# Altium PCB Drone_PCB_STM32_MCU_for_altium.pcbdoc
Units mm, origin at the board's own origin, x right, y up, seen from the top; angles counter-clockwise.
Board outline 112.57 x 115.06 mm, 2 copper layers (Top Layer, Bottom Layer); 72 components, 102 nets, 269 pads, 48 vias.
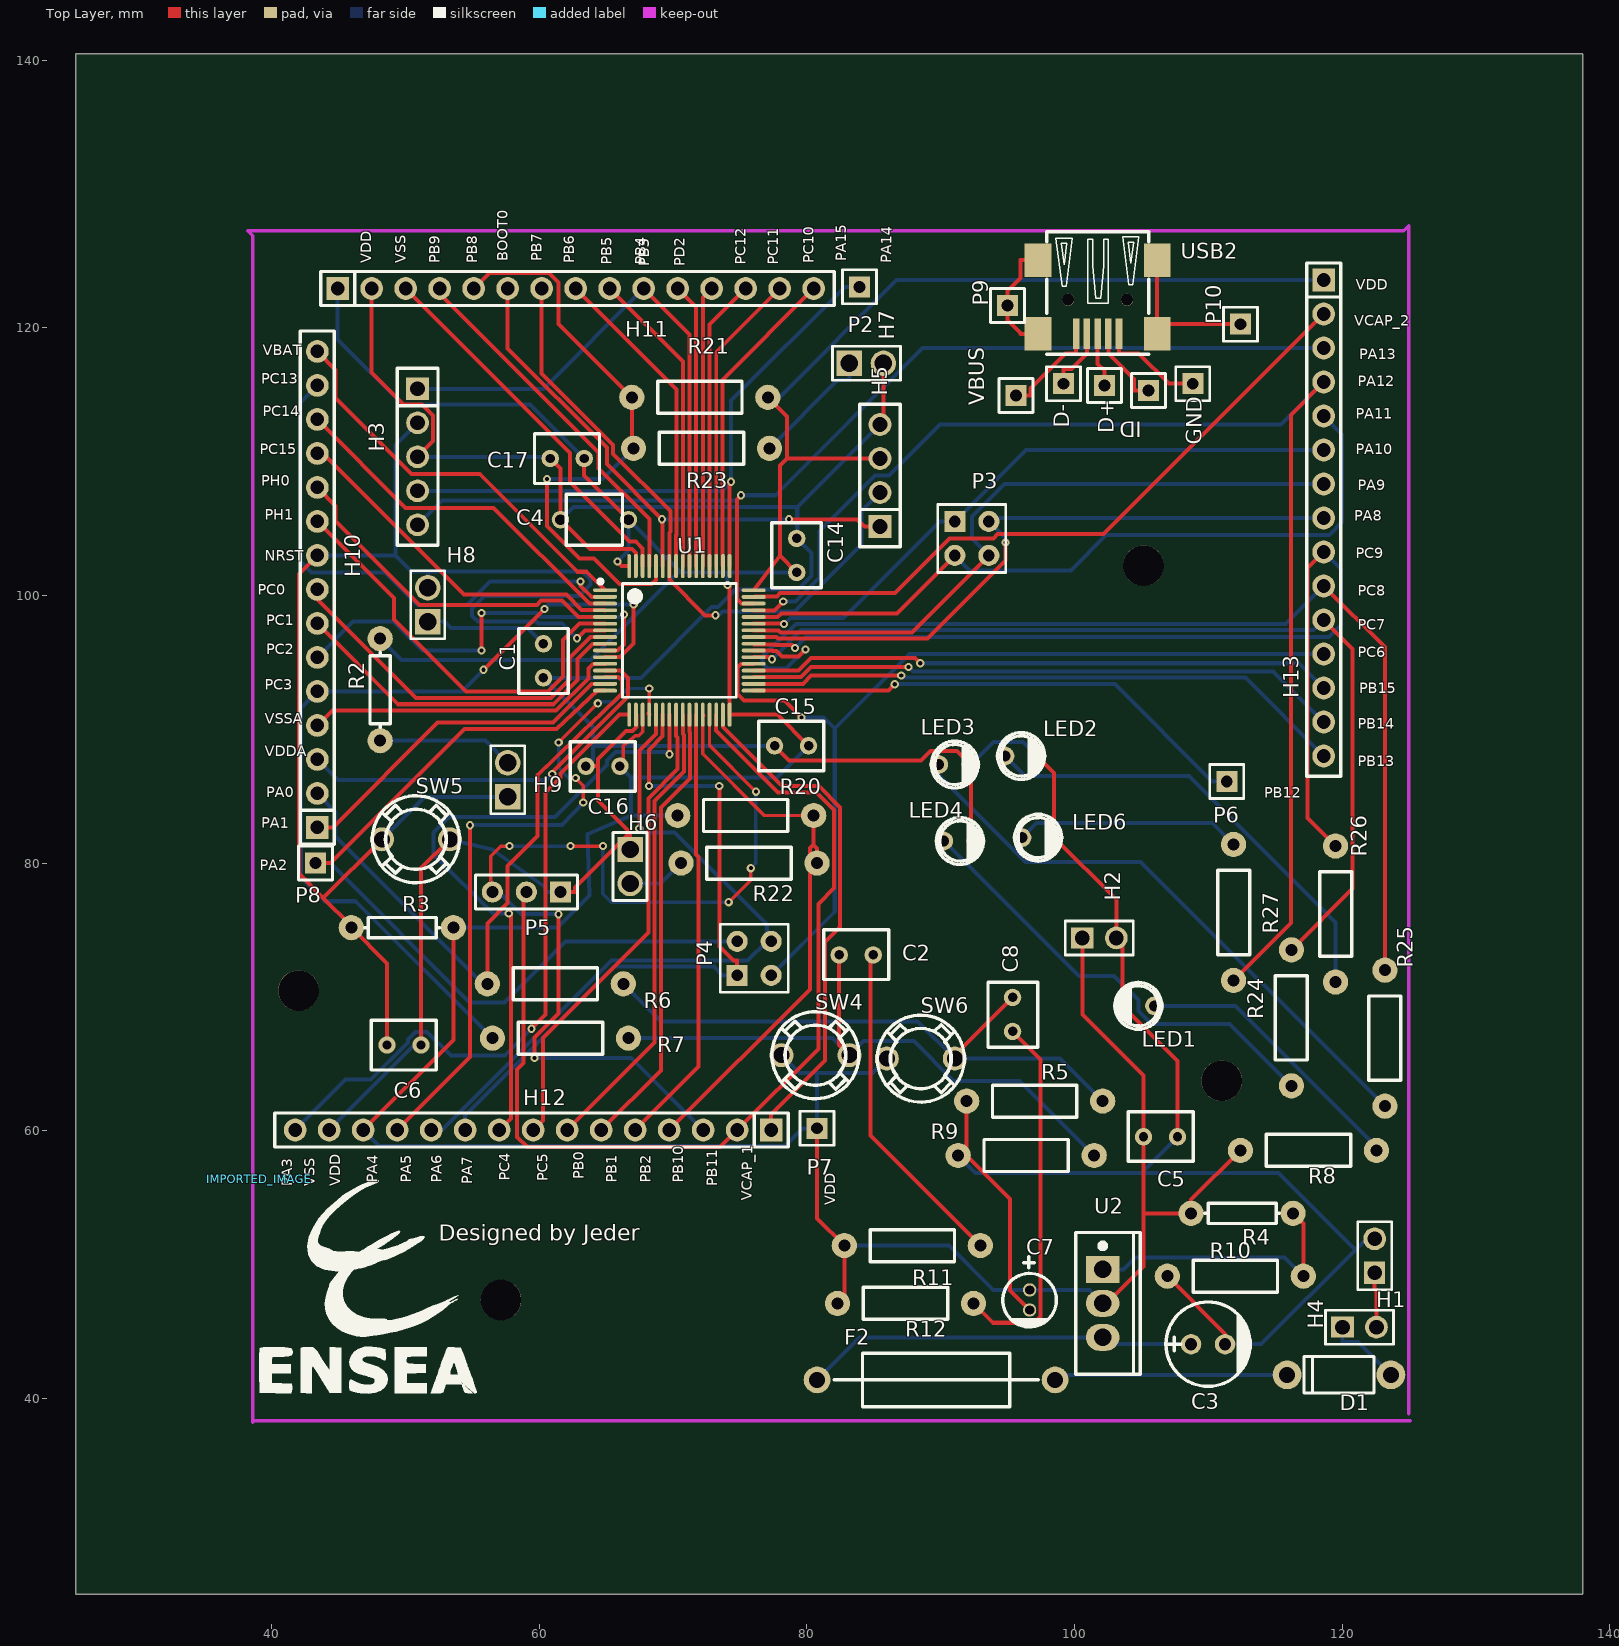
[diagram p0: Top Layer view]
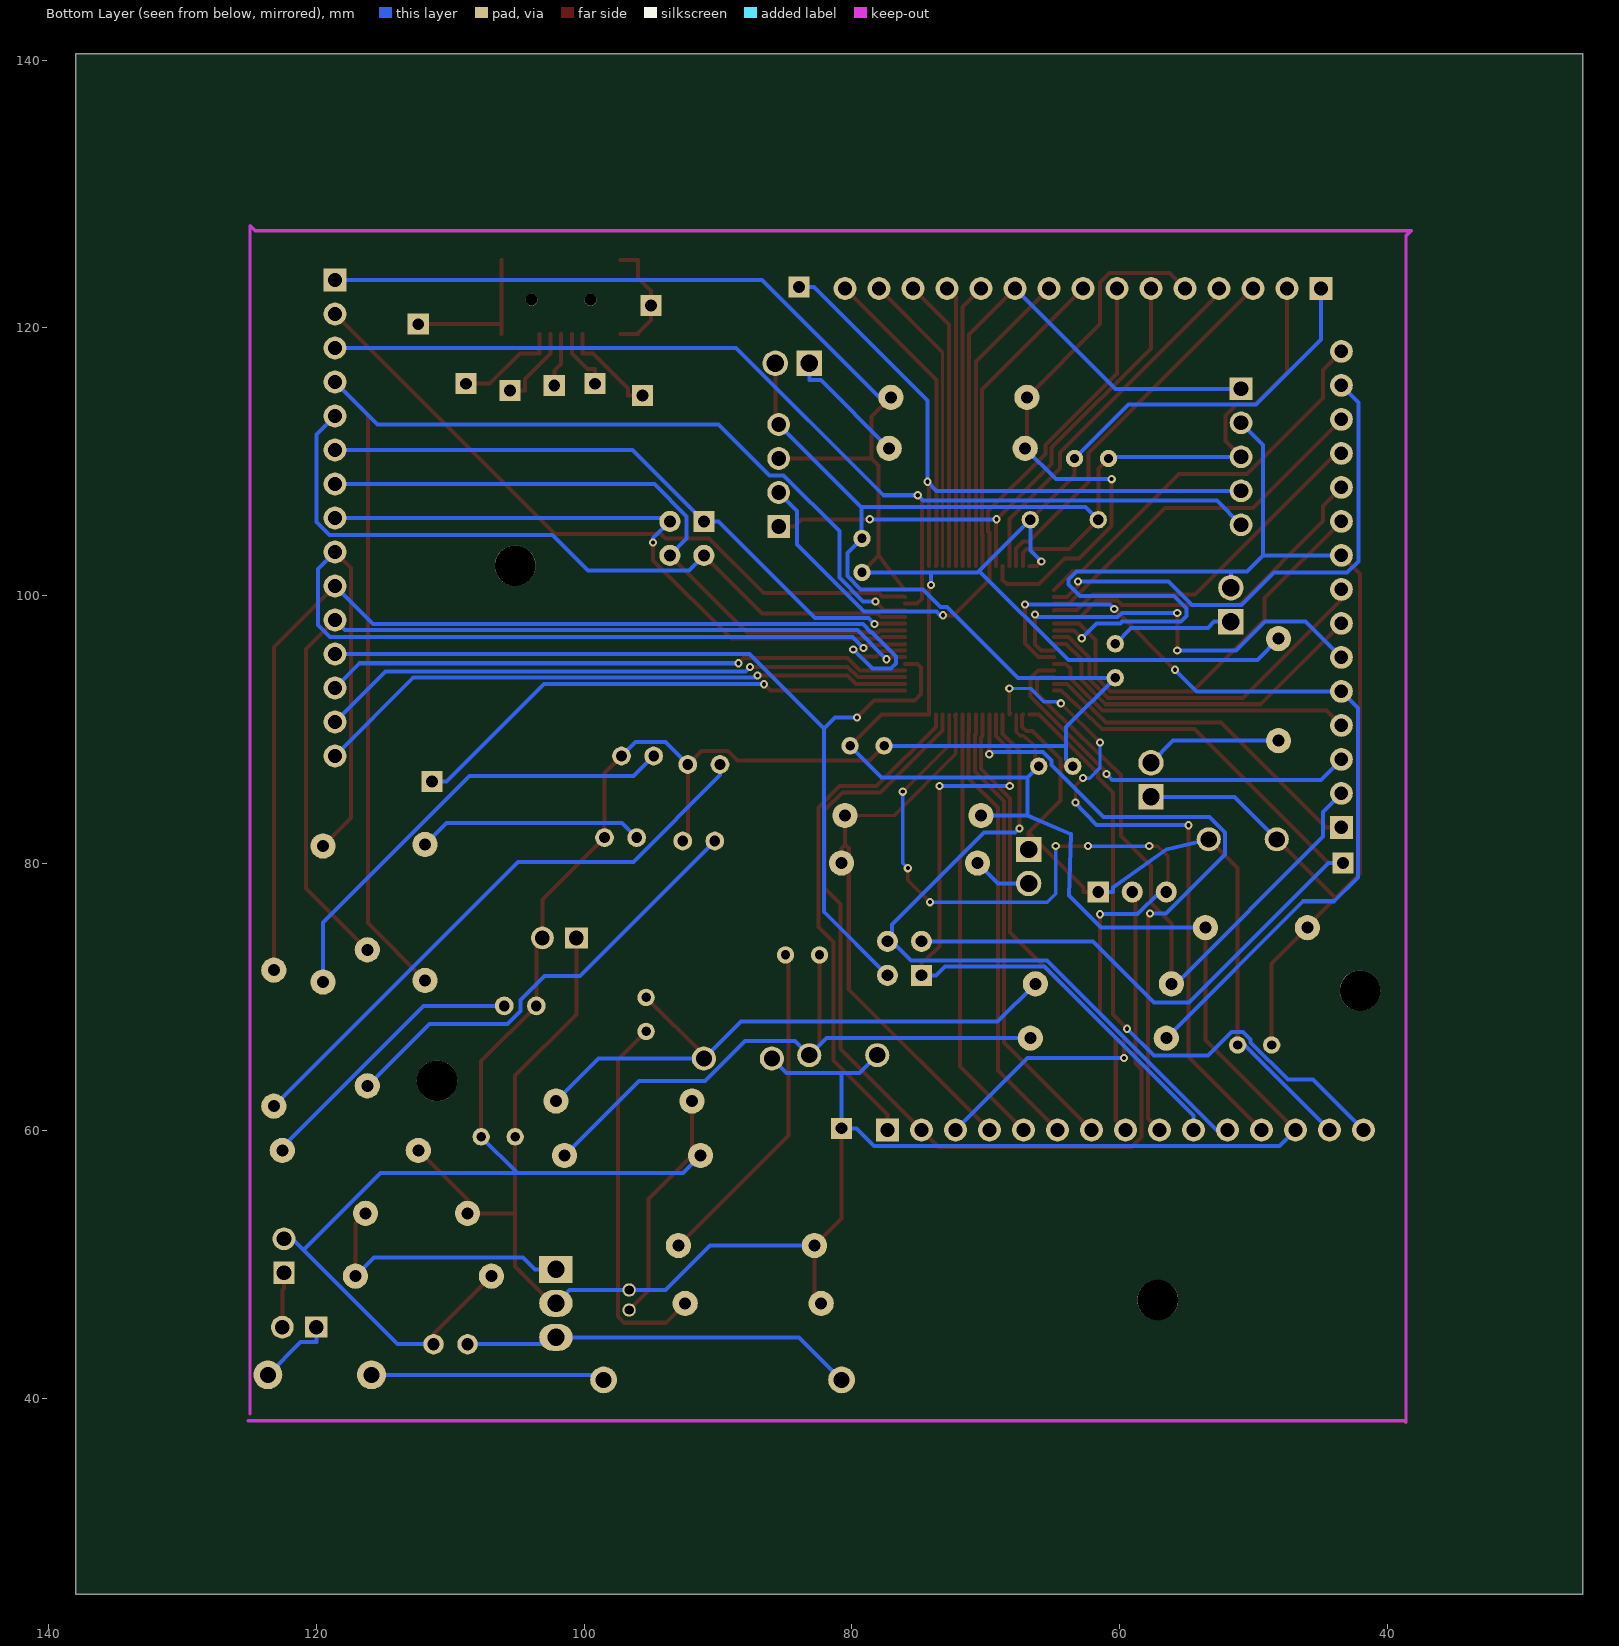
[diagram p1: Bottom Layer view, seen from below]

## Layer stack, top to bottom
Top Layer: signal copper (thickness not stored)
Dielectric: dielectric 0.32, FR-4, Dk 4.8
Bottom Layer: signal copper (thickness not stored)

## Board outline
137.973,25.4 25.4,25.4 25.4,140.462 137.973,140.462

## Components (designator, comment, footprint, x,y, rotation, side; value= is the part's Value field where it differs from the comment)
C1 "100nF" CAP-CT4G-0805-2.54MM 60.325,95.123 r90 top
C2 "100nF" CAP-CT4G-0805-2.54MM 83.693,73.152 r180 top
C3 "100uF" CAP-D6.3XF2.5 109.982,44.069 r0 top
C4 "470nF" CAP-4.2*3.8-5.08 64.135,105.664 r0 top
C5 "100nF" CAP-CT4G-0805-2.54MM 106.426,59.563 r180 top
C6 "100nF" CAP-CT4G-0805-2.54MM 49.911,66.421 r0 top
C7 "10uF" CAP-D4.0XF1.5 96.647,47.371 r0 top
C8 "100nF" CAP-CT4G-0805-2.54MM 95.377,68.707 r90 top
C14 "100nF" CAP-CT4G-0805-2.54MM 79.248,102.997 r270 top
C15 "100nF" CAP-CT4G-0805-2.54MM 78.867,88.773 r0 top
C16 "100nF" CAP-CT4G-0805-2.54MM 64.77,87.249 r0 top
C17 "100nF" CAP-CT4G-0805-2.54MM 62.103,110.236 r0 top
D1 "1N4001GP-E3/73" DO-41 119.761,41.783 r180 top
D+ "Header-Male-2.54_1x1" HDR-1X1/2.54 102.235,115.697 r90 top
D- "Header-Male-2.54_1x1" HDR-1X1/2.54 99.187,115.824 r90 top
F2 "3F0.5A 250V" 3.6*10 89.662,41.402 r180 top
GND "Header-Male-2.54_1x1" HDR-1X1/2.54 108.839,115.824 r90 top
H1 "Header-Male-2.54_1x2" HDR-2X1/2.54#1 122.428,49.403 r180 top
H2 "Header-Male-2.54_1x2" HDR-2X1/2.54#1 100.584,74.422 r90 top
H3 "Header-Male-2.54_1x5" DIP-1X5P-2.54MM-M 50.927,110.363 r270 top
H4 "Header-Male-2.54_1x2" HDR-2X1/2.54#1 120.015,45.339 r90 top
H5 "MPU" DIP-1X4P-2.54MM-M 85.471,108.966 r90 top
H6 "Header-Male-2.54_1x2" HDR-2X1/2.54#2 66.802,79.756 r0 top
H7 "Header-Male-2.54_1x2" HDR-2X1/2.54#2 84.455,117.348 r90 top
H8 "Header-Male-2.54_1x2" HDR-2X1/2.54#2 51.689,99.314 r180 top
H9 "Header-Male-2.54_1x2" HDR-2X1/2.54#2 57.658,86.233 r180 top
H10 "Header-Male-2.54_1x15" DIP-1X15P-2.54MM-M 43.434,100.457 r90 top
H11 "Header-Male-2.54_1x15" DIP-1X15P-2.54MM-M 62.738,122.936 r0 top
H12 "Header-Male-2.54_1x15" DIP-1X15P-2.54MM-M 59.563,60.071 r180 top
H13 "Header-Male-2.54_1x15" DIP-1X15P-2.54MM-M 118.618,105.791 r270 top
ID "Header-Male-2.54_1x1" HDR-1X1/2.54 105.537,115.316 r90 top
IMPORTED_IMAGE "IMPORTED_IMAGE" IMPORTED_IMAGE 39.112,56.392 r0 top
LED1 "204-10SUBC/S400-A4" LED-3MM 104.775,69.342 r180 top
LED2 "204-10SUBC/S400-A4" LED-3MM 96.012,88.011 r0 top
LED3 "204-10SUBC/S400-A4" LED-3MM 91.059,87.376 r0 top
LED4 "204-10SUBC/S400-A4" LED-3MM 91.44,81.661 r0 top
LED6 "204-10SUBC/S400-A4" LED-3MM 97.282,81.915 r0 top
P2 "Header-Male-2.54_1x1" HDR-1X1/2.54 83.947,123.063 r0 top
P3 "Header-Male-2.54_2x2" HDR-2X2/2.54 92.329,104.267 r0 top
P4 "Header-Male-2.54_2x2" HDR-2X2/2.54 76.073,72.898 r90 top
P5 "DEBUG" HDR-3X1/2.54 59.055,77.851 r180 top
P6 "Header-Male-2.54_1x1" HDR-1X1/2.54 111.379,86.106 r0 top
P7 "Header-Male-2.54_1x1" HDR-1X1/2.54 80.772,60.198 r0 top
P8 "Header-Male-2.54_1x1" HDR-1X1/2.54 43.307,80.01 r0 top
P9 "Header-Male-2.54_1x1" HDR-1X1/2.54 94.996,121.666 r90 top
P10 "Header-Male-2.54_1x1" HDR-1X1/2.54 112.395,120.269 r90 top
R2 "100K" AXIAL-0.3 48.133,92.964 r90 top
R3 "100K" AXIAL-0.3 49.784,75.184 r0 top
R4 "240" AXIAL-0.3 112.522,53.848 r180 top
R5 "220K" AXIAL-0.4 97.028,62.23 r0 top
R6 "330" AXIAL-0.4 61.214,70.993 r0 top
R7 "330" AXIAL-0.4 61.595,66.929 r0 top
R8 "330" AXIAL-0.4 117.475,58.547 r180 top
R9 "220K" AXIAL-0.4 96.393,58.166 r0 top
R10 "390" AXIAL-0.4 112.014,49.149 r0 top
R11 "100" AXIAL-0.4 87.884,51.435 r180 top
R12 "100" AXIAL-0.4 87.376,47.117 r180 top
R20 "10K" AXIAL-0.4 75.438,83.566 r0 top
R21 "10K" AXIAL-0.4 72.009,114.808 r180 top
R22 "510" AXIAL-0.4 75.692,80.01 r0 top
R23 "510" AXIAL-0.4 72.136,110.998 r180 top
R24 "680" AXIAL-0.4 116.205,68.453 r270 top
R25 "680" AXIAL-0.4 123.19,66.929 r270 top
R26 "680" AXIAL-0.4 119.507,76.2 r270 top
R27 "680" AXIAL-0.4 111.887,76.327 r90 top
SW4 "SKPLAFD010" SW-DIP-6.45X5 80.645,65.659 r0 top
SW5 "SKPLAFD010" SW-DIP-6.45X5 50.8,81.788 r0 top
SW6 "SKPLAFD010" SW-DIP-6.45X5 88.519,65.405 r0 top
U1 "STM32F405RGT6" LQFP-64_10X10X05P 70.485,96.647 r0 top
U2 "LM317T-DG" TO-220(TO-220-3) 102.108,47.117 r0 top
USB2 "USB-MINI-SMD-9.2X9.4-H3.7" USB-MINI-SMD-9.4X9.2-H3.7 101.727,122.301 r180 top
VBUS "Header-Male-2.54_1x1" HDR-1X1/2.54 95.631,114.935 r90 top

## Footprints (in the part's own frame and the unit in brackets; to place one, negate y for a bottom-side part, rotate by r counter-clockwise, add the part's x,y. Pads: shape width x height; smd on the part's side, far side on the other; paste and mask are expansions set on the pad)
3.6*10 [mm]
  round 2 hole 1.2: 1(-8.89,0) 2(8.89,0)
  silkscreen extent -7.62,-2 7.62,2
AXIAL-0.3 [mil]
  round 74 hole 35.4: 1(-150,0) 2(150,0)
  silkscreen extent -110,-30 110,30
AXIAL-0.4 [mil]
  round 74 hole 35.4: 1(-200,0) 2(200,0)
  silkscreen extent -124,-47 124,47
CAP-4.2*3.8-5.08 [mm]
  round 1.3 hole 0.8: 1(-2.54,0) 2(2.54,0)
  silkscreen extent -2.1,-1.9 2.1,1.9
CAP-CT4G-0805-2.54MM [mm]
  round 1.3 hole 0.7: 1(-1.27,0) 2(1.27,0)
  silkscreen extent -2.44,-1.87 2.41,1.84
CAP-D4.0XF1.5 [mm]
  round 1 hole 0.7: 1(0,0.751) 2(0,-0.751)
  silkscreen extent -2,-2.02 2,3.23
CAP-D6.3XF2.5 [mil]
  round 60 hole 36: 1(-50,0) 2(50,0)
  silkscreen extent -124,-124 125,124
DIP-1X4P-2.54MM-M [mm]
  rect 1.7x1.7 hole 1.1: 1(-3.81,0)
  round 1.7 hole 1.1: 2(-1.27,0) 3(1.27,0) 4(3.81,0)
  silkscreen extent -5.33,-1.52 5.33,1.52
DIP-1X5P-2.54MM-M [mm]
  rect 1.7x1.7 hole 1.1: 1(-5.08,0)
  round 1.7 hole 1.1: 2(-2.54,0) 3(0,0) 4(2.54,0) 5(5.08,0)
  silkscreen extent -6.6,-1.52 6.6,1.52
DIP-1X15P-2.54MM-M [mm]
  rect 1.7x1.7 hole 1.02: 1(-17.78,0)
  round 1.7 hole 1.02: 2(-15.24,0) 3(-12.7,0) 4(-10.16,0) 5(-7.62,0) 6(-5.08,0) 7(-2.54,0) 8(0,0) 9(2.54,0) 10(5.08,0) 11(7.62,0) 12(10.16,0) 13(12.7,0) 14(15.24,0) 15(17.78,0)
  silkscreen extent -19.05,-1.27 19.3,1.27
DO-41 [mil]
  round 85 hole 47.24: 1(-152.5,0) 2(152.5,0)
  silkscreen extent -102,-54 102,54
HDR-1X1/2.54 [mil]
  rect 62x62 hole 35: 1(0,0)
  silkscreen extent -50,-50 50,50
HDR-2X1/2.54#1 [mm]
  rect 1.575x1.7 hole 1.1: 1(0,0)
  round 1.7 hole 1.1: 2(0,-2.54)
  silkscreen extent -1.27,-3.81 1.27,1.27
HDR-2X1/2.54#2 [mm]
  rect 1.9x1.9 hole 1.3: 1(0,1.27)
  round 1.9 hole 1.3: 2(0,-1.27)
  silkscreen extent -1.27,-2.54 1.27,2.54
HDR-2X2/2.54 [mil]
  rect 62x62 hole 35: 1(-50,50)
  round 62 hole 35: 2(50,50) 3(-50,-50) 4(50,-50)
  silkscreen extent -100,-100 100,100
HDR-3X1/2.54 [mil]
  rect 62x62 hole 35: 1(-100,0)
  round 62 hole 35: 2(0,0) 3(100,0)
  silkscreen extent -150,-50 150,50
IMPORTED_IMAGE [mm]
  silkscreen extent 0,-16.04 16.25,0
LED-3MM [mm]
  round 1.4 hole 0.8: 1(-1.201,0) 2(1.201,0)
  silkscreen extent -1.75,-1.75 1.75,1.75
LQFP-64_10X10X05P [mm]
  oval 1.8x0.28 smd: 1(-5.55,3.75) 2(-5.55,3.25) 3(-5.55,2.75) 4(-5.55,2.25) 5(-5.55,1.75) 6(-5.55,1.25) 7(-5.55,0.75) 8(-5.55,0.25) 9(-5.55,-0.25) 10(-5.55,-0.75) 11(-5.55,-1.25) 12(-5.55,-1.75) 13(-5.55,-2.25) 14(-5.55,-2.75) 15(-5.55,-3.25) 16(-5.55,-3.75) 33(5.55,-3.75) 34(5.55,-3.25) 35(5.55,-2.75) 36(5.55,-2.25) 37(5.55,-1.75) 38(5.55,-1.25) 39(5.55,-0.75) 40(5.55,-0.25) 41(5.55,0.25) 42(5.55,0.75) 43(5.55,1.25) 44(5.55,1.75) 45(5.55,2.25) 46(5.55,2.75) 47(5.55,3.25) 48(5.55,3.75)
  oval 0.28x1.8 smd: 17(-3.75,-5.55) 18(-3.25,-5.55) 19(-2.75,-5.55) 20(-2.25,-5.55) 21(-1.75,-5.55) 22(-1.25,-5.55) 23(-0.75,-5.55) 24(-0.25,-5.55) 25(0.25,-5.55) 26(0.75,-5.55) 27(1.25,-5.55) 28(1.75,-5.55) 29(2.25,-5.55) 30(2.75,-5.55) 31(3.25,-5.55) 32(3.75,-5.55) 49(3.75,5.55) 50(3.25,5.55) 51(2.75,5.55) 52(2.25,5.55) 53(1.75,5.55) 54(1.25,5.55) 55(0.75,5.55) 56(0.25,5.55) 57(-0.25,5.55) 58(-0.75,5.55) 59(-1.25,5.55) 60(-1.75,5.55) 61(-2.25,5.55) 62(-2.75,5.55) 63(-3.25,5.55) 64(-3.75,5.55)
  silkscreen extent -6.05,-4.25 4.25,4.55
SW-DIP-6.45X5 [mm]
  round 1.8 hole 1.2: 1(-2.54,0) 2(2.54,0)
  silkscreen extent -3.25,-3.25 3.25,3.25
TO-220(TO-220-3) [mm]
  rect 2.5x2 hole 1.3: 1(0,2.54)
  oval 2.5x2 hole 1.3: 2(0,0) 3(0,-2.54)
  silkscreen extent -2,-5.3 2.8,5.3
USB-MINI-SMD-9.4X9.2-H3.7 [mm]
  rect 0.5x2.3 smd: 1(-1.6,2.75) 2(-0.8,2.75) 3(0,2.75) 4(0.8,2.75) 5(1.599,2.75)
  rect 2x2.5 smd: 6(4.45,2.751) 7(4.45,-2.751) 8(-4.45,2.751) 9(-4.45,-2.751)
  round 0.9 hole 0.9 unplated: ""(-2.2,0.2) ""(2.2,0.2)
  silkscreen extent -3.81,-4.87 3.81,4.27

## Free pads (board coordinates)
  round 3.032 hole 3.032 unplated: ""(42.037,70.485) ""(57.15,47.371) ""(105.156,102.235) ""(110.998,63.754)

## Via types
v1: diameter 0.61, hole 0.31, Top Layer to Bottom Layer, 38 vias
v2: diameter 0.62, hole 0.305, Top Layer to Bottom Layer, 10 vias

## Nets (pads, with @x,y where several pads share a name; then routed paths per layer and width w, separated by ;. In a path a pad name is that pad's centre, name@x,y a point inside that pad or via, vN(x,y) a via of type N, cw(c..) or ccw(c..) an arc to the next point about the centre after c; other vN are vias at no path point)
BOOT0: H11.5 R21.2 R23.2 U1.60 | length 43.9
  Top Layer w0.3: H11.5 56.284,124.102 60.757,124.102 61.468,123.391 61.468,120.269 R21.2 66.929,111.125 R23.2 ; v1(60.594,108.692) 60.594,105.179 63.017,102.756 64.122,102.756 66.027,100.851 68.412,100.851 68.735,101.171 U1.60@68.735,102.212
  Bottom Layer w0.3: v1(60.594,108.692) 64.75,108.692 R23.2
BOOT1: H12.4 R20.2 R22.2 U1.28 | length 42.7
  Top Layer w0.254: U1.28 72.235,88.166 76.835,83.566 R20.2
  Top Layer w0.3: H12.4 80.236,70.584 80.236,81.125 80.472,81.361 80.518,81.361 ; U1.28@72.235,91.105 72.283,91.056 U1.28@72.283,90.998 ; R20.2 80.518,81.361 ; R22.2 80.772,81.107 80.518,81.361
D1_1: D1.1 H4.1 | length 5.7
  Bottom Layer w0.3: H4.1 120.015,44.239 121.178,44.239 D1.1
D1_2: D1.2 F2.1 | length 17.5
  Bottom Layer w0.3: F2.1 98.933,41.783 D1.2
D+_1: D+.1 USB2.3 | length 4.1
  Top Layer w0.3: USB2.3@101.727,119.55 101.727,117.305 102.235,116.797 D+.1
D-_1: D-.1 USB2.4 | length 4.8
  Top Layer w0.3: D-.1 99.187,116.924 99.761,116.924 100.927,118.09 USB2.4@100.927,119.55
GND: C1.1 C3.2 C4.1 C5.1 C6.2 C7.2 C14.1 C15.1 C16.1 C17.1 H1.2 H2.2 H3.3 H5.4 H6.1 H7.2 H11.2 H12.14 LED1.2 LED2.2 LED3.2 LED4.2 LED6.2 P5.1 R5.1 R9.1 R10.1 SW5.2 U1.18 U1.63 | length 313
  Top Layer w0.3: H11.2 47.498,116.652 49.873,114.28 51.252,114.28 52.09,113.439 52.09,111.526 H3.3 ; C6.2 51.181,79.629 SW5.2 ; C17.1 61.595,109.474 C4.1 63.792,103.467 66.944,103.467 67.234,103.177 U1.63@67.234,102.22 ; P5.1 62.695,77.851 62.695,78.181 66.802,82.288 ; C16.1 64.409,87.249 ; H6.1 66.802,82.288 ; U1.18@67.234,91.12 67.282,91.072 67.282,91.013 67.282,90.188 66.967,89.873 66.5,89.873 64.409,87.782 64.409,87.249 ; C15.1 78.682,87.688 88.537,87.688 89.248,88.4 91.237,88.4 LED3.2 92.26,82.042 LED4.2 ; H5.4 85.725,113.03 H7.2 ; R9.1 R9.1@91.948,58.166 ; R5.1 R9.1@91.948,58.166 ; C7.2 95.199,48.067 95.199,54.915 R9.1@91.948,58.166 ; LED2.2 98.483,86.741 LED6.2 103.124,77.274 H2.2 103.574,73.972 LED1.2 107.696,65.22 C5.1 ; R10.1 111.252,44.831 C3.2 ; 64.409,87.249 64.409,84.681 66.802,82.288
  Bottom Layer w0.3: H12.14 50.673,66.421 C6.2 ; H3.3 60.706,110.363 C17.1 ; SW5.2 56.515,81.026 60.495,78.186 60.495,77.851 P5.1 ; C4.1 62.558,106.627 79.289,106.627 ; C16.1 64.013,87.762 64.013,88.773 ; C15.1 64.013,88.773 ; H5.4 79.322,106.627 79.289,106.627 ; R9.1 92.616,56.863 104.996,56.863 ; LED3.2 93.942,89.057 96.167,89.057 LED2.2 ; C5.1 104.996,56.863 ; C3.2 113.934,44.069 120.98,51.112 ; H1.2 121.808,51.943 120.98,51.112 ; 64.013,88.773 64.013,90.165 C1.1 67.607,93.853 72.898,99.144 73.381,99.144 74.684,100.447 79.345,100.447 80.348,101.45 80.348,103.167 C14.1 79.289,104.308 79.289,106.627 ; 104.996,56.863 115.23,56.863 120.98,51.112
GND_1: GND.1 USB2.1 | length 7.9
  Top Layer w0.3: USB2.1@103.327,119.55 103.327,118.09 104.79,118.09 107.056,115.824 GND.1
H1_1: H1.1 H4.2 | length 4.1
  Top Layer w0.3: H1.1 122.428,48.24 122.555,48.113 H4.2
H6_2: H6.2 R22.1 | length 4.4
  Bottom Layer w0.3: H6.2 69.088,78.486 R22.1
H7_1: H7.1 R23.1 | length 9.3
  Bottom Layer w0.3: R23.1 82.304,116.086 83.185,116.086 H7.1
H8_1: C1.2 H8.1 | length 9.3
  Bottom Layer w0.3: H8.1 52.951,98.044 53.414,97.582 59.136,97.582 C1.2
H9_2: H9.2 R2.1 | length 10.2
  Bottom Layer w0.3: R2.1 56.007,89.154 H9.2
ID_1: ID.1 USB2.2 | length 6.1
  Top Layer w0.3: USB2.2@102.527,119.55 102.527,118.09 104.437,116.18 104.437,115.316 ID.1
LED1: H13.11 R24.1 U1.38 | length 71.3
  Top Layer w0.3: U1.38@76.027,95.395 77.246,95.395 v1(77.406,95.237) ; R24.1 120.772,78.097 120.772,96.017 H13.11
  Bottom Layer w0.3: v1(77.406,95.237) 79.578,97.406 117.853,97.406 H13.11
LED1_1: LED1.1 R8.1 | length 21.2
  Bottom Layer w0.3: LED1.1 112.022,69.342 122.555,58.809 R8.1
LED2: H13.10 R25.1 U1.39 | length 83.4
  Top Layer w0.3: U1.39@76.027,95.895 77.429,95.895 77.47,95.855 77.749,95.855 78.146,95.458 79.383,95.458 v1(79.901,95.974) ; H13.10 123.19,96.139 R25.1
  Bottom Layer w0.3: v1(79.901,95.974) 78.466,94.541 77.099,94.541 76.708,94.932 76.708,95.438 78.511,97.244 78.557,97.244 79.184,97.869 115.776,97.869 H13.10
LED2_1: LED2.1 R26.2 | length 34.3
  Bottom Layer w0.3: LED2.1 96.299,86.523 108.562,86.523 119.507,75.578 R26.2
LED3: H13.9 R26.1 U1.40 | length 74
  Top Layer w0.3: U1.40@76.027,96.396 76.065,96.357 77.62,96.357 77.66,96.317 78.882,96.317 v1(79.124,96.078) ; H13.9 117.414,102.044 117.414,83.373 R26.1
  Bottom Layer w0.3: v1(79.124,96.078) 79.947,96.901 119.002,96.901 119.898,97.798 119.898,101.971 H13.9
LED3_1: LED3.1 R25.2 | length 44.4
  Bottom Layer w0.3: LED3.1 89.858,86.584 96.332,80.109 104.93,80.109 R25.2
LED4: H13.4 R27.1 U1.45 | length 99.2
  Top Layer w0.3: U1.45@76.027,98.895 77.584,98.895 v1(78.247,99.558) ; R27.1 116.164,75.522 116.164,113.495 H13.4
  Bottom Layer w0.3: v1(78.247,99.558) 79.154,99.558 80.937,101.343 80.937,104.808 85.098,108.966 86.152,108.966 89.962,112.776 115.443,112.776 H13.4
LED4_1: LED4.1 R24.2 | length 34
  Bottom Layer w0.3: LED4.1 100.322,71.577 102.961,71.577 104.775,69.766 104.775,68.976 105.745,68.006 111.572,68.006 R24.2
LED6_1: LED6.1 R27.2 | length 16.9
  Bottom Layer w0.3: LED6.1 97.168,83.002 110.292,83.002 R27.2
NRST: C6.1 H3.2 H8.2 H9.1 H10.9 R3.1 SW5.1 U1.7 | length 111.1
  Top Layer w0.3: H10.9 42.057,101.62 42.057,79.22 43.873,77.401 ; SW5.1 43.873,77.401 ; C6.1 48.641,72.517 R3.1 45.974,75.303 43.873,77.401 ; v1(62.835,96.807) 63.426,97.396 U1.7@64.92,97.396
  Bottom Layer w0.3: H10.9 49.276,102.997 ; SW5.1 51.435,84.963 H9.1 ; H3.2 49.276,111.252 49.276,102.997 ; H8.2 51.689,101.79 ; v1(62.835,96.807) 61.725,97.914 59.949,97.914 59.822,98.044 55.428,98.044 54.988,98.481 54.988,99.032 55.921,99.962 62.974,99.962 63.83,100.818 63.83,101.183 63.226,101.79 51.689,101.79 ; 49.276,102.997 50.482,101.79 51.689,101.79
P9_1: P9.1 USB2.6 USB2.7 | length 8.9
  Top Layer w0.3: USB2.6 95.964,119.55 95.964,119.598 94.996,120.566 P9.1 94.996,122.766 95.964,123.734 95.964,125.052 USB2.7
P10_1: P10.1 USB2.8 USB2.9 | length 11.7
  Top Layer w0.3: USB2.8 USB2.8@106.177,120.269 ; USB2.9 USB2.8@106.177,120.269 ; P10.1 111.295,120.269 USB2.8@106.177,120.269
PA0: H10.2 R6.1 U1.14 | length 47.9
  Top Layer w0.3: R6.1 56.134,75.499 57.65,77.015 57.65,79.779 59.901,82.029 59.901,86.604 64.262,90.805 64.496,90.99 66.18,92.677 66.18,93.642 65.928,93.896 U1.14@64.92,93.896
  Bottom Layer w0.3: H10.2 44.811,83.84 44.811,81.981 55.799,70.993 R6.1
PA1: H10.1 U1.15 | length 25.9
  Top Layer w0.3: H10.1 44.597,82.677 52.426,90.503 61.026,90.503 63.919,93.396 U1.15@64.92,93.396
PA3: H12.15 U1.17 | length 49.3
  Top Layer w0.3: v1(59.441,67.635) 60.49,68.684 60.49,85.291 61.6,86.401 61.6,86.711 66.01,91.12 U1.17@66.733,91.12
  Bottom Layer w0.3: H12.15 45.542,63.83 47.427,63.83 50.218,66.622 50.218,66.845 50.777,67.404 51.636,67.404 53.406,65.634 57.437,65.634 v1(59.441,67.635)
PA4: H12.12 U1.20 | length 50.4
  Top Layer w0.254: v2(61.468,89.027) v2(64.389,91.948) ; v2(62.738,86.36) 63.299,85.799 v1(63.299,84.549) ; v2@68.199,93.091 v2(68.235,93.055) U1.20
  Top Layer w0.3: H12.12 54.846,65.514 v1(54.846,82.842) ; U1.20@68.189,91.219 68.189,91.161 U1.20@68.235,91.112
  Bottom Layer w0.254: v2(61.468,89.027) 61.468,87.122 62.23,86.36 v2(62.738,86.36) ; v2(64.389,91.948) 64.516,92.075 65.659,92.075 66.639,93.055 v2(68.235,93.055)
  Bottom Layer w0.3: v1(54.846,82.842) 61.719,82.842 v1@63.373,84.582
PA7: H12.9 U1.23 | length 49
  Top Layer w0.3: H12.9 57.897,60.945 57.897,76.081 v1(57.742,76.233) ; v1(69.736,88.141) U1.23@69.736,91.112
  Bottom Layer w0.3: v1(57.742,76.233) 56.553,76.233 52.116,80.67 52.116,82.286 53.292,83.462 61.206,83.462 65.077,87.333 65.077,87.673 65.712,88.311 69.566,88.311 v1(69.736,88.141)
PA15: H11.15 U1.50 | length 23.6
  Top Layer w0.3: U1.50@73.736,102.212 73.688,102.26 73.688,102.316 73.688,116.106 H11.15
PB0: H12.6 U1.26 | length 33.8
  Top Layer w0.3: H12.6 69.098,64.526 69.098,84.163 71.28,86.345 71.28,89.766 71.237,89.809 U1.26@71.237,91.112
PB1: H12.5 U1.27 | length 33.1
  Top Layer w0.3: H12.5 71.918,64.806 71.918,80.475 71.742,80.65 71.742,91.097 U1.27@71.735,91.105
PB4: H11.9 U1.56 | length 23
  Top Layer w0.3: H11.9 70.742,117.472 70.742,102.217 U1.56@70.736,102.212
PB5: H11.8 U1.57 | length 23.9
  Top Layer w0.3: H11.8 70.279,115.395 70.279,104.574 70.236,104.531 U1.57@70.236,102.212
PB8: H11.4 U1.61 | length 27.2
  Top Layer w0.3: H11.4 52.578,122.56 64.45,110.688 64.45,109.487 68.235,105.7 U1.61@68.235,102.212
PB9: H11.3 U1.62 | length 28.3
  Top Layer w0.3: H11.3 62.321,110.653 62.321,108.463 66.754,104.028 67.224,104.028 67.737,103.518 U1.62@67.737,102.212
PB12: P6.1 U1.33 | length 38.6
  Top Layer w0.3: U1.33@76.027,92.895 86.091,92.895 v1(86.568,93.373)
  Bottom Layer w0.3: v1(86.568,93.373) 103.012,93.373 110.279,86.106 P6.1
PB13: H13.15 U1.34 | length 45.3
  Top Layer w0.3: U1.34@76.027,93.396 79.71,93.396 80.328,94.013 v1(87.061,94.013)
  Bottom Layer w0.3: v1(87.061,94.013) 87.216,93.858 112.771,93.858 H13.15
PB14: H13.14 U1.35 | length 44.6
  Top Layer w0.3: U1.35@76.027,93.896 79.555,93.896 80.328,94.666 v1(87.602,94.666)
  Bottom Layer w0.3: v1(87.602,94.666) 87.947,94.32 114.849,94.32 H13.14
PB15: H13.13 U1.36 | length 43.9
  Top Layer w0.3: U1.36@76.027,94.397 79.4,94.397 80.33,95.326 88.087,95.326 v1(88.473,94.94)
  Bottom Layer w0.3: v1(88.473,94.94) 116.769,94.94 H13.13
PC0: H10.8 U1.8 | length 28.1
  Top Layer w0.3: H10.8 43.434,99.7 50.795,92.339 60.879,92.339 62.268,93.729 62.268,95.329 63.835,96.896 U1.8@64.92,96.896
PC1: H10.7 U1.9 | length 26.8
  Top Layer w0.3: H10.7 49.474,91.877 61.069,91.877 62.865,93.673 62.865,95.27 63.99,96.396 U1.9@64.92,96.396
PC2: H10.6 U1.10 | length 31.8
  Top Layer w0.3: v1(55.695,95.885) v1(55.695,98.684) ; U1.10@64.92,95.895 65.872,95.895 66.335,96.357 v1(66.335,98.59)
  Bottom Layer w0.3: H10.6 46.101,98.044 49.136,98.044 51.295,95.885 v1(55.695,95.885) ; v1(55.695,98.684) 59.835,98.684 60.142,98.379 66.124,98.379 v1(66.335,98.59)
PC3: H10.5 R7.1 U1.11 | length 65.5
  Top Layer w0.3: v1(55.852,94.45) v1(60.399,98.996) ; U1.11@64.92,95.397 66.055,95.397 67.069,96.411 v1(67.069,99.319)
  Bottom Layer w0.3: v1(55.852,94.45) 54.239,92.837 H10.5 42.207,91.61 42.207,78.943 43.99,77.16 46.284,77.16 R7.1 ; v1(60.399,98.996) 60.721,99.319 v1(67.069,99.319)
PC4: H12.8 U1.24 | length 35.6
  Top Layer w0.3: H12.8 60.289,60.797 60.289,66.957 68.174,74.841 68.174,84.854 70.353,87.033 70.353,89.383 70.236,89.499 U1.24@70.236,91.112
PC5: H12.7 U1.25 | length 34.7
  Top Layer w0.3: H12.7 68.636,66.604 68.636,84.661 70.815,86.84 70.815,89.573 70.736,89.654 U1.25@70.736,91.112
PC10: H11.14 U1.51 | length 22.7
  Top Layer w0.254: U1.51 73.235,118.193 H11.14
PC11: H11.13 U1.52 | length 21.9
  Top Layer w0.3: U1.52@72.735,102.205 72.735,120.233 H11.13
PC12: H11.12 U1.53 | length 21
  Top Layer w0.3: U1.53@72.235,102.205 72.235,122.273 H11.12
PC13: H10.14 U1.2 | length 39.1
  Top Layer w0.3: v1(63.106,101.036) 63.106,100.726 63.937,99.896 U1.2@64.92,99.896
  Bottom Layer w0.3: H10.14 42.169,114.432 42.169,102.555 42.997,101.727 48.484,101.727 50.904,99.306 54.61,99.306 56.337,101.036 v1(63.106,101.036)
PC14: H10.13 U1.3 | length 27.2
  Top Layer w0.3: H10.13 50.038,106.553 56.609,106.553 63.764,99.395 U1.3@64.92,99.395
PC15: H10.12 U1.4 | length 26.3
  Top Layer w0.3: H10.12 43.843,110.617 54.384,100.076 62.045,100.076 63.188,98.933 64.884,98.933 U1.4@64.92,98.897
PD2: H11.11 U1.54 | length 21.3
  Top Layer w0.3: H11.11 71.735,121.559 U1.54@71.735,102.205
PH0: H10.11 U1.5 | length 26.4
  Top Layer w0.3: H10.11 44.811,106.7 44.811,105.557 51.062,99.306 59.835,99.306 60.142,99.614 61.717,99.614 62.934,98.397 U1.5@64.92,98.397
PH1: H10.10 U1.6 | length 31.4
  Top Layer w0.3: H10.10 49.167,99.804 49.167,98.207 54.554,92.819 60.681,92.819 61.806,93.944 61.806,96.672 63.03,97.897 U1.6@64.92,97.897
PWM1: H13.8 P3.2 U1.41 | length 49.9
  Top Layer w0.3: U1.41@76.027,96.896 77.739,96.896 77.854,96.779 89.012,96.779 94.856,102.624 v1(94.856,103.965)
  Bottom Layer w0.3: v1(94.856,103.965) 94.856,104.28 P3.2 93.853,105.791 H13.8
PWM2: H13.7 P3.4 U1.42 | length 50.7
  Top Layer w0.3: U1.42@76.027,97.396 77.894,97.396 78.047,97.244 87.846,97.244 P3.4
  Bottom Layer w0.3: P3.4 92.344,104.252 92.344,105.915 94.76,108.331 H13.7
PWM3: H13.6 P3.1 U1.43 | length 48
  Top Layer w0.3: U1.43@76.027,97.894 78.268,97.894 v1(78.301,97.861)
  Bottom Layer w0.3: v1(78.301,97.861) 78.773,98.334 82.756,98.334 89.959,105.537 P3.1 96.393,110.871 H13.6
PWM4: H13.5 P3.3 U1.44 | length 56.3
  Top Layer w0.3: U1.44@76.027,98.395 77.826,98.395 78.1,98.669 86.731,98.669 P3.3
  Bottom Layer w0.3: P3.3 92.172,101.884 99.725,101.884 102.362,104.521 119.04,104.521 119.995,105.479 119.995,112.034 H13.5
PWM5: P4.2 P8.1 U1.16 | length 64.6
  Top Layer w0.3: P8.1 44.407,80.01 54.422,90.025 61.3,90.04 64.374,92.895 U1.16@64.92,92.895
  Bottom Layer w0.3: P8.1 44.407,80.01 54.803,69.614 57.429,69.614 61.984,74.168 P4.2
PWM6: H12.11 P4.4 U1.21 | length 54
  Top Layer w0.3: v1(67.488,82.603) 67.488,88.405 68.735,89.654 U1.21@68.735,91.112
  Bottom Layer w0.3: H12.11 52.748,60.071 65.413,72.733 75.58,72.733 P4.4@77.015,74.168 ; v1(67.488,82.603) 67.803,82.288 70.134,82.288 77.015,75.408 P4.4@77.015,74.168 ; P4.4 P4.4@77.015,74.168
PWM7: H12.10 P4.1 U1.22 | length 52.1
  Top Layer w0.3: v1(68.214,85.766) 68.214,88.476 69.235,89.499 U1.22@69.235,91.112 ; v1(73.464,85.766) 73.464,73.792 74.529,72.728 74.803,72.728 P4.1
  Bottom Layer w0.3: H12.10 54.483,61.151 65.603,72.271 73.061,72.271 73.703,71.628 P4.1 ; v1(68.214,85.766) v1(73.464,85.766)
PWM8: H13.12 P4.3 U1.37 | length 70.9
  Top Layer w0.3: U1.37@76.027,94.894 75.1,94.894 74.823,94.618 74.823,92.652 75.306,92.166 78.344,92.166 v1(79.619,90.894)
  Bottom Layer w0.3: P4.3 82.09,76.375 82.09,90.058 ; v1(79.619,90.894) 81.257,90.894 82.09,90.058 ; H13.12 87.666,95.631 82.09,90.058
R6_2: C8.2 R5.2 R6.2 SW6.2 | length 45.8
  Top Layer w0.3: SW6.2 91.059,65.659 C8.2
  Bottom Layer w0.3: R6.2 69.106,68.181 88.283,68.181 SW6.2 98.933,65.405 R5.2
R7_2: C2.2 R7.2 R9.2 SW4.2 | length 47.1
  Top Layer w0.3: C2.2 82.423,66.421 SW4.2
  Bottom Layer w0.3: R7.2 81.915,66.929 SW4.2 84.234,66.708 87.996,66.708 90.975,63.729 95.91,63.729 R9.2
R11_1: C2.1 R11.1 | length 25.2
  Top Layer w0.3: C2.1 84.745,72.934 84.745,59.654 R11.1
R12_1: C8.1 R12.1 | length 28
  Top Layer w0.3: R12.1 93.901,45.672 97.013,45.672 97.467,46.126 97.467,65.347 C8.1
S$10: 
S$12: 
S$15: 
S$17: 
S$19: 
S$21: 
S$28: 
S$30: 
S$32: 
S$34: 
S$80: 
S$82: 
S$84: 
S$86: 
S$88: 
S$160: 
S$163142: 
SCL: H5.2 H11.7 U1.58 | length 47.9
  Top Layer w0.3: H11.7 60.198,116.576 65.54,111.234 65.54,110.579 69.817,106.304 69.817,104.767 69.736,104.686 69.736,102.212 69.736,101.199 72.41,98.524 v1(73.193,98.524)
  Bottom Layer w0.3: v1(73.193,98.524) 73.421,98.524 73.69,98.796 79.091,98.796 84.094,103.8 84.094,106.319 H5.2
SDA: H5.1 H11.6 U1.59 | length 42
  Top Layer w0.3: H11.6 57.658,118.463 65.077,111.044 65.077,109.817 v1(69.197,105.697) 69.235,105.659 U1.59@69.235,102.212 ; v1(78.671,105.697) 83.767,105.697 84.308,105.156 H5.1
  Bottom Layer w0.3: v1(69.197,105.697) v1(78.671,105.697)
SWCLK: H3.4 P2.1 U1.49 | length 49.2
  Top Layer w0.3: U1.49@74.237,102.212 74.237,108.389 v1(74.348,108.501)
  Bottom Layer w0.3: H3.4 73.67,107.823 v1(74.348,108.501) 74.348,114.564 82.847,123.063 P2.1
SWDIO: H3.5 H13.3 U1.46 | length 82.4
  Top Layer w0.3: v1(75.085,107.49) 74.78,107.188 74.78,99.733 75.12,99.395 U1.46@76.027,99.395
  Bottom Layer w0.3: H3.5 52.733,107.089 74.684,107.089 v1(75.085,107.49) 77.653,107.49 88.654,118.491 H13.3
SWO: H3.1 H11.10 U1.55 | length 42.1
  Top Layer w0.3: H11.10 71.237,119.517 U1.55@71.237,102.212
  Bottom Layer w0.3: H3.1 60.325,115.443 H11.10
U2_1: R4.1 R10.2 U2.1 | length 21
  Top Layer w0.3: R4.1 117.094,53.086 R10.2
  Bottom Layer w0.3: U2.1 103.67,49.657 104.564,50.551 115.692,50.551 R10.2
U2_3: C3.1 F2.2 U2.3 | length 29.5
  Bottom Layer w0.3: F2.2 83.947,44.577 U2.3 102.616,44.069 C3.1
USART_RX: H12.2 P5.2 U1.30 | length 75.2
  Top Layer w0.3: P5.2 58.824,77.617 58.824,65.062 58.359,64.597 58.359,59.563 59.129,58.793 73.525,58.793 H12.2 80.861,66.129 80.861,76.962 82.032,78.133 82.032,83.97 80.714,85.291 77.864,85.291 73.236,89.919 U1.30@73.236,91.112
USART_TX: H12.3 P5.3 U1.29 | length 73
  Top Layer w0.254: P5.3 56.388,77.978 56.388,80.518 57.15,81.28 v2(57.785,81.28) ; v2(62.357,81.28) v2(64.77,81.28) ; U1.29 72.735,88.809 v2(76.2,85.344) ; v2(74.168,77.089) 75.819,78.74 v2(75.819,79.629)
  Top Layer w0.3: v1(59.672,65.446) 59.672,66.992 61.455,68.776 v1(61.455,76.19)
  Bottom Layer w0.254: v2(57.785,81.28) v2(62.357,81.28) ; v2@64.77,81.407 64.77,77.724 65.405,77.089 v2(74.168,77.089) ; v2(75.819,79.629) 76.2,80.01 v2(76.2,85.344)
  Bottom Layer w0.3: P5.3 57,77.851 58.659,76.19 v1(61.455,76.19) ; v1(59.672,65.446) 66.888,65.446 H12.3
VBAT: H10.15 U1.1 | length 30.1
  Top Layer w0.3: H10.15 44.811,116.86 44.811,114.765 50.482,109.093 55.57,109.093 62.885,101.775 63.541,101.775 U1.1@64.92,100.396
VBUS_1: USB2.5 VBUS.1 | length 7.6
  Top Layer w0.3: VBUS.1 96.731,114.935 96.731,115.484 99.337,118.09 100.129,118.09 USB2.5@100.129,119.55
VCAP_1: H12.1 U1.31 | length 38.4
  Top Layer w0.3: U1.31@73.736,91.112 73.736,90.162 78.146,85.753 80.922,85.753 82.499,84.176 82.499,75.232 81.379,74.115 81.379,65.27 77.343,61.234 H12.1
VCAP_2: H13.2 U1.47 | length 51.3
  Top Layer w0.3: U1.47@76.027,99.896 76.083,99.896 76.131,99.944 76.134,99.944 77.76,99.944 77.993,100.175 86.586,100.175 90.678,104.267 93.937,104.267 94.249,104.582 102.169,104.582 H13.2
VDD: C4.2 C5.2 C7.1 C14.2 C15.2 C16.2 C17.2 H2.1 H5.3 H11.1 H12.13 H13.1 P7.1 R2.2 R3.2 R4.2 R8.2 R11.2 R12.2 R20.1 R21.1 SW4.1 SW6.1 U1.19 U1.32 U1.48 U1.64 U2.2 | length 350.9
  Top Layer w0.254: C16.2 66.294,87.503 66.294,88.265 66.294,88.773 67.234,89.535 67.437,89.535 67.735,89.833 U1.19
  Top Layer w0.3: H12.13 53.594,66.802 R3.2 ; C17.2 63.373,108.966 C4.2 ; v1(65.849,102.537) 66.167,102.22 U1.64@66.733,102.22 ; v1(74.082,100.782) 74.237,100.627 74.237,91.112 77.798,91.112 C15.2 ; U1.48 77.998,102.977 ; R21.1 78.522,113.375 78.522,110.236 ; C14.2 77.998,102.977 ; P7.1 80.772,53.467 R11.2 82.804,47.625 R12.2 ; H5.3 78.522,110.236 ; H2.1 100.584,68.71 105.156,64.138 C5.2 105.156,53.848 ; U2.2 102.403,47.117 105.156,49.87 105.156,53.848 ; R8.2 108.712,54.864 R4.2 105.156,53.848 ; 77.998,102.977 77.998,109.713 78.522,110.236
  Bottom Layer w0.3: H11.1 44.958,119.144 49.825,114.28 59.329,114.28 C17.2 ; H12.13 48.042,58.892 78.367,58.892 79.672,60.198 P7.1 80.772,64.32 ; R2.2 49.718,95.189 63.83,95.189 70.49,101.849 ; R3.2 61.387,75.184 63.779,77.577 63.627,82.169 66.881,83.566 ; v1(65.849,102.537) 66.675,103.363 C4.2 70.49,101.849 ; C16.2 66.881,86.408 ; R20.1 66.881,83.566 ; v1(74.082,100.782) 74.082,101.727 ; R21.1 77.95,114.808 86.713,123.571 H13.1 ; SW4.1 79.444,64.32 80.772,64.32 ; C14.2 74.082,101.727 ; C15.2 77.772,86.408 66.881,86.408 ; R11.2 90.617,51.435 93.932,48.12 96.647,48.12 101.105,48.12 U2.2 ; SW6.1 84.894,64.32 80.772,64.32 ; 66.881,83.566 66.881,86.408 ; 70.49,101.849 70.612,101.727 74.082,101.727
VDDA: H10.3 U1.13 | length 29.9
  Top Layer w0.3: v1(60.983,86.657) 60.983,86.784 66.657,92.459 66.657,93.84 66.101,94.397 U1.13@64.92,94.397
  Bottom Layer w0.3: H10.3 44.966,86.225 60.551,86.225 v1(60.983,86.657)
VSSA: H10.4 U1.12 | length 23.8
  Top Layer w0.3: H10.4 44.552,91.412 61.277,91.412 63.68,93.817 63.68,94.541 64.036,94.897 U1.12@64.92,94.897
pads on no net: USB2.

## Silkscreen, mask and mechanical layers (free items; w line width, h text height)
Top Overlay:
  text "BOOT0" at 57.677,124.968 h0.8 r90
  text "PB7" at 60.217,124.968 h0.8 r90
  text "PA15" at 82.95,124.968 h0.8 r90
  text "VSS" at 50.057,124.841 h0.8 r90
  text "PB9" at 52.597,124.841 h0.8 r90
  text "PB8" at 55.391,124.841 h0.8 r90
  text "PB6" at 62.63,124.841 h0.8 r90
  text "PC10" at 80.537,124.841 h0.8 r90
  text "PA14" at 86.308,124.837 h0.8 r89
  text "VDD" at 47.446,124.828 h0.8 r90
  text "PB5" at 65.424,124.714 h0.8 r90
  text "PB4" at 67.964,124.714 h0.8 r90
  text "PC12" at 75.457,124.714 h0.8 r90
  text "PC11" at 77.87,124.714 h0.8 r90
  text "PB3" at 68.218,124.587 h0.8 r90
  text "PD2" at 70.885,124.587 h0.8 r90
  text "VDD" at 121.031,122.861 h0.8
  text "VCAP_2" at 120.904,120.138 h0.8
  text "VBAT" at 39.37,117.964 h0.8
  text "PA13" at 121.285,117.654 h0.8
  text "PC13" at 39.243,115.805 h0.8
  text "PA12" at 121.158,115.622 h0.8
  text "PC14" at 39.37,113.392 h0.8
  text "PA11" at 121.031,113.209 h0.8
  text "PC15" at 39.116,110.542 h0.8
  text "PA10" at 121.031,110.542 h0.8
  text "PH0" at 39.243,108.185 h0.8
  text "PA9" at 121.158,107.875 h0.8
  text "PH1" at 39.497,105.645 h0.8
  text "PA8" at 120.904,105.589 h0.8
  text "PC9" at 121.031,102.795 h0.8
  text "NRST" at 39.497,102.597 h0.8
  text "PC0" at 38.989,100.057 h0.8
  text "PC8" at 121.158,100.001 h0.8
  text "PC1" at 39.624,97.771 h0.8
  text "PC7" at 121.158,97.461 h0.8
  text "PC2" at 39.624,95.612 h0.8
  text "PC6" at 121.158,95.373 h0.8
  text "PC3" at 39.497,92.945 h0.8
  text "PB15" at 121.285,92.706 h0.8
  text "VSSA" at 39.497,90.405 h0.8
  text "PB14" at 121.158,90.039 h0.8
  text "VDDA" at 39.497,87.992 h0.8
  text "PB13" at 121.158,87.245 h0.8
  text "PA0" at 39.624,84.944 h0.8
  text "PB12" at 114.173,84.888 h0.8
  text "PA1" at 39.236,82.658 h0.8 r359
  text "PA2" at 39.116,79.483 h0.8
  text "PB0" at 63.321,56.375 h0.8 r90
  text "PC4" at 57.804,56.261 h0.8 r90
  text "PC5" at 60.654,56.248 h0.8 r90
  text "PA4" at 47.898,56.127 h0.8 r89
  text "PA5" at 50.438,56.134 h0.8 r90
  text "PA6" at 52.724,56.134 h0.8 r90
  text "PB1" at 65.805,56.134 h0.8 r90
  text "PB2" at 68.345,56.134 h0.8 r90
  text "PB10" at 70.758,56.134 h0.8 r90
  text "PA7" at 55.01,56.007 h0.8 r90
  text "PA3" at 41.548,55.88 h0.8 r90
  text "VSS" at 43.255,55.867 h0.8 r90
  text "VDD" at 45.16,55.867 h0.8 r90
  text "PB11" at 73.298,55.88 h0.8 r90
  text "VCAP_1" at 75.894,54.794 h0.8 r89
  text "VDD" at 82.117,54.435 h0.8 r90
  text "Designed by Jeder" at 52.507,51.387 h2.03
Document:
  lines w0.003: 81.661,82.906 81.712,82.956